# EAGLE board elm-post (EAGLE 4.16), part 1 of 2
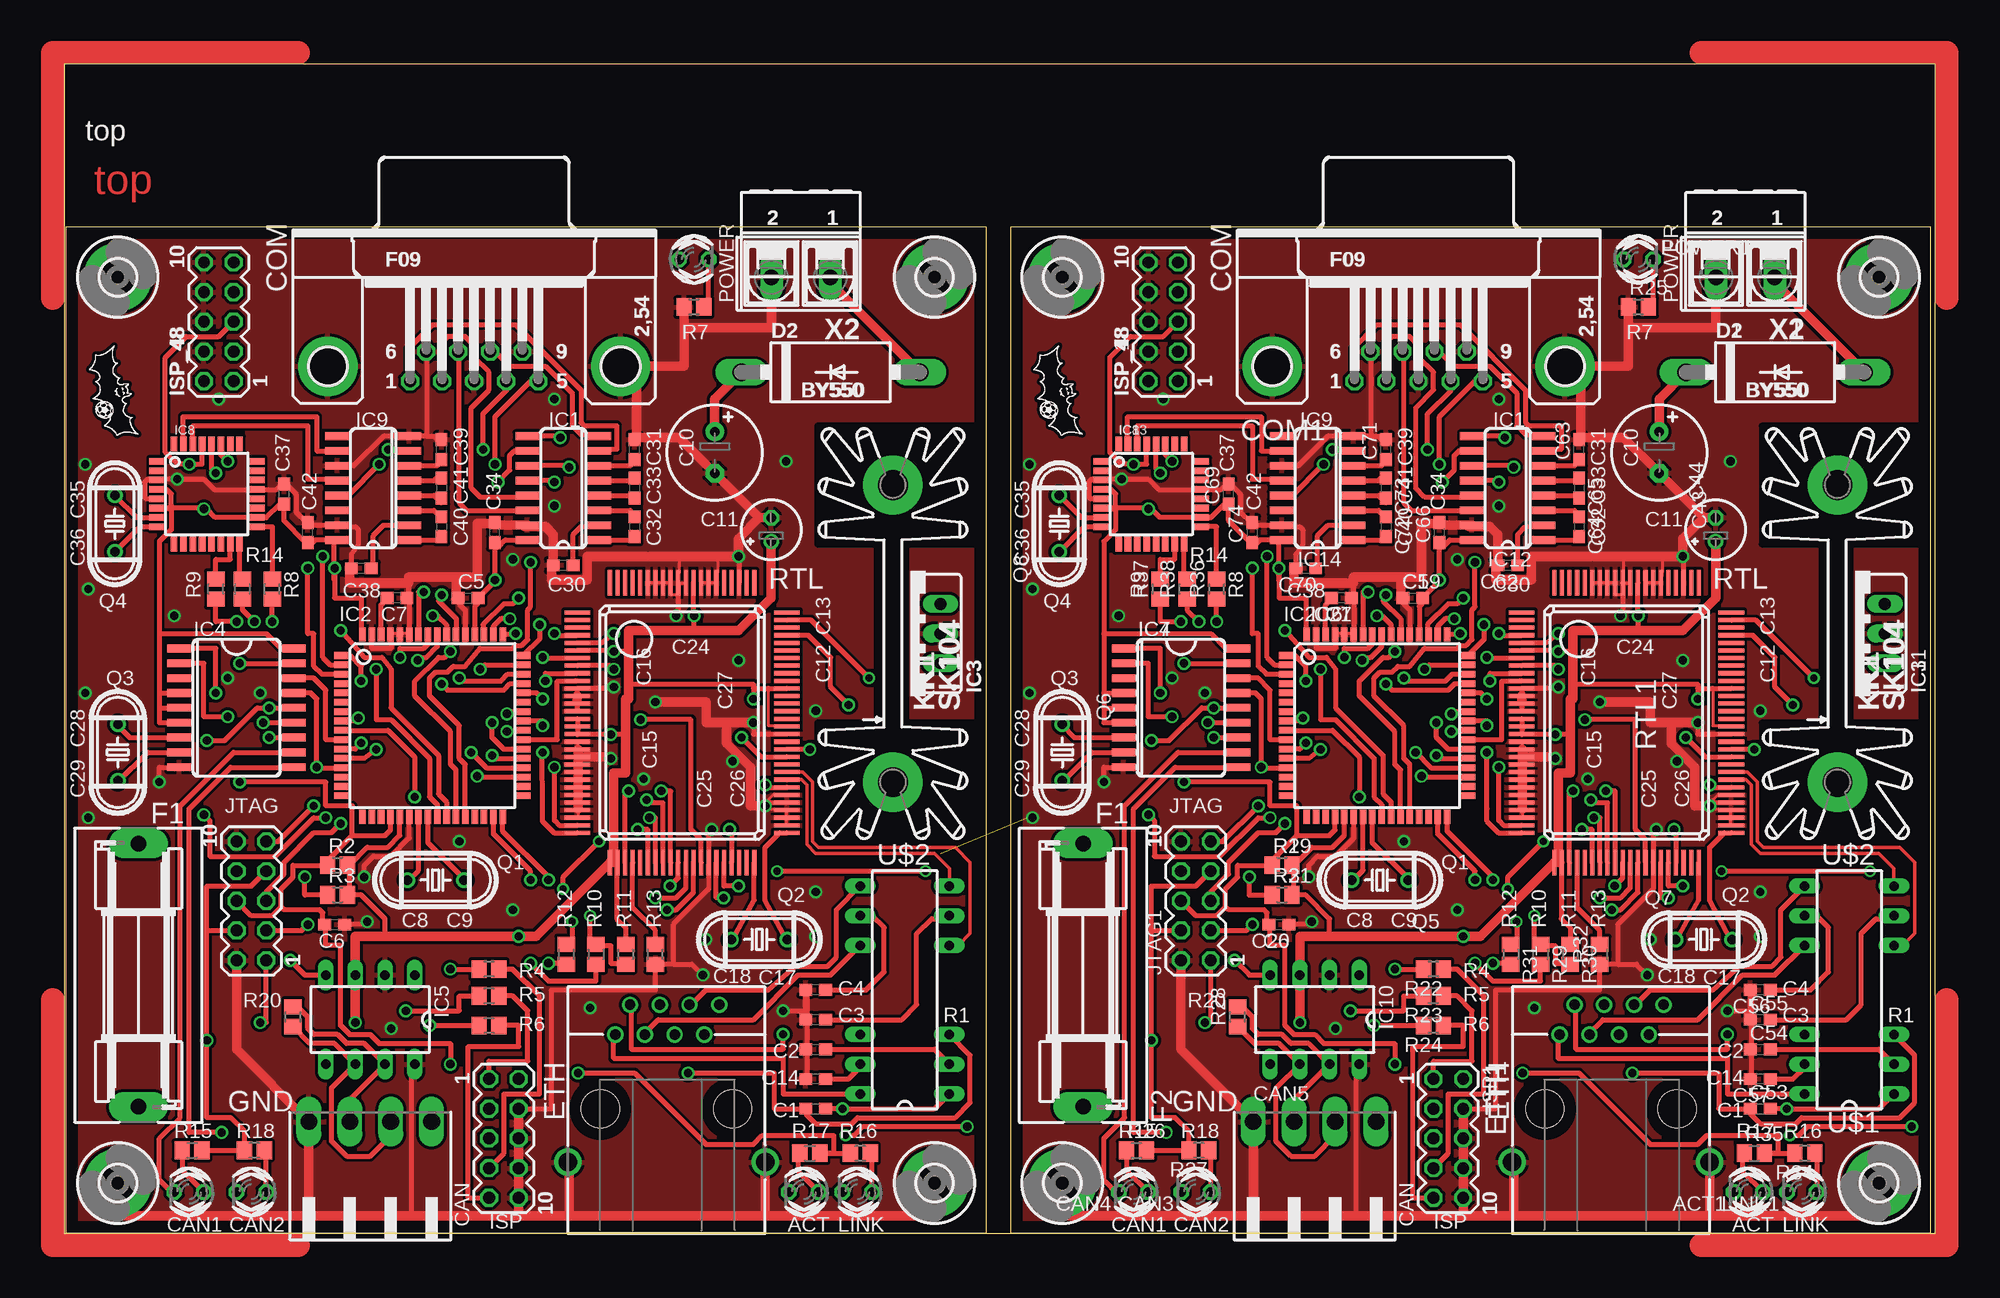
[diagram p0: board, top side]
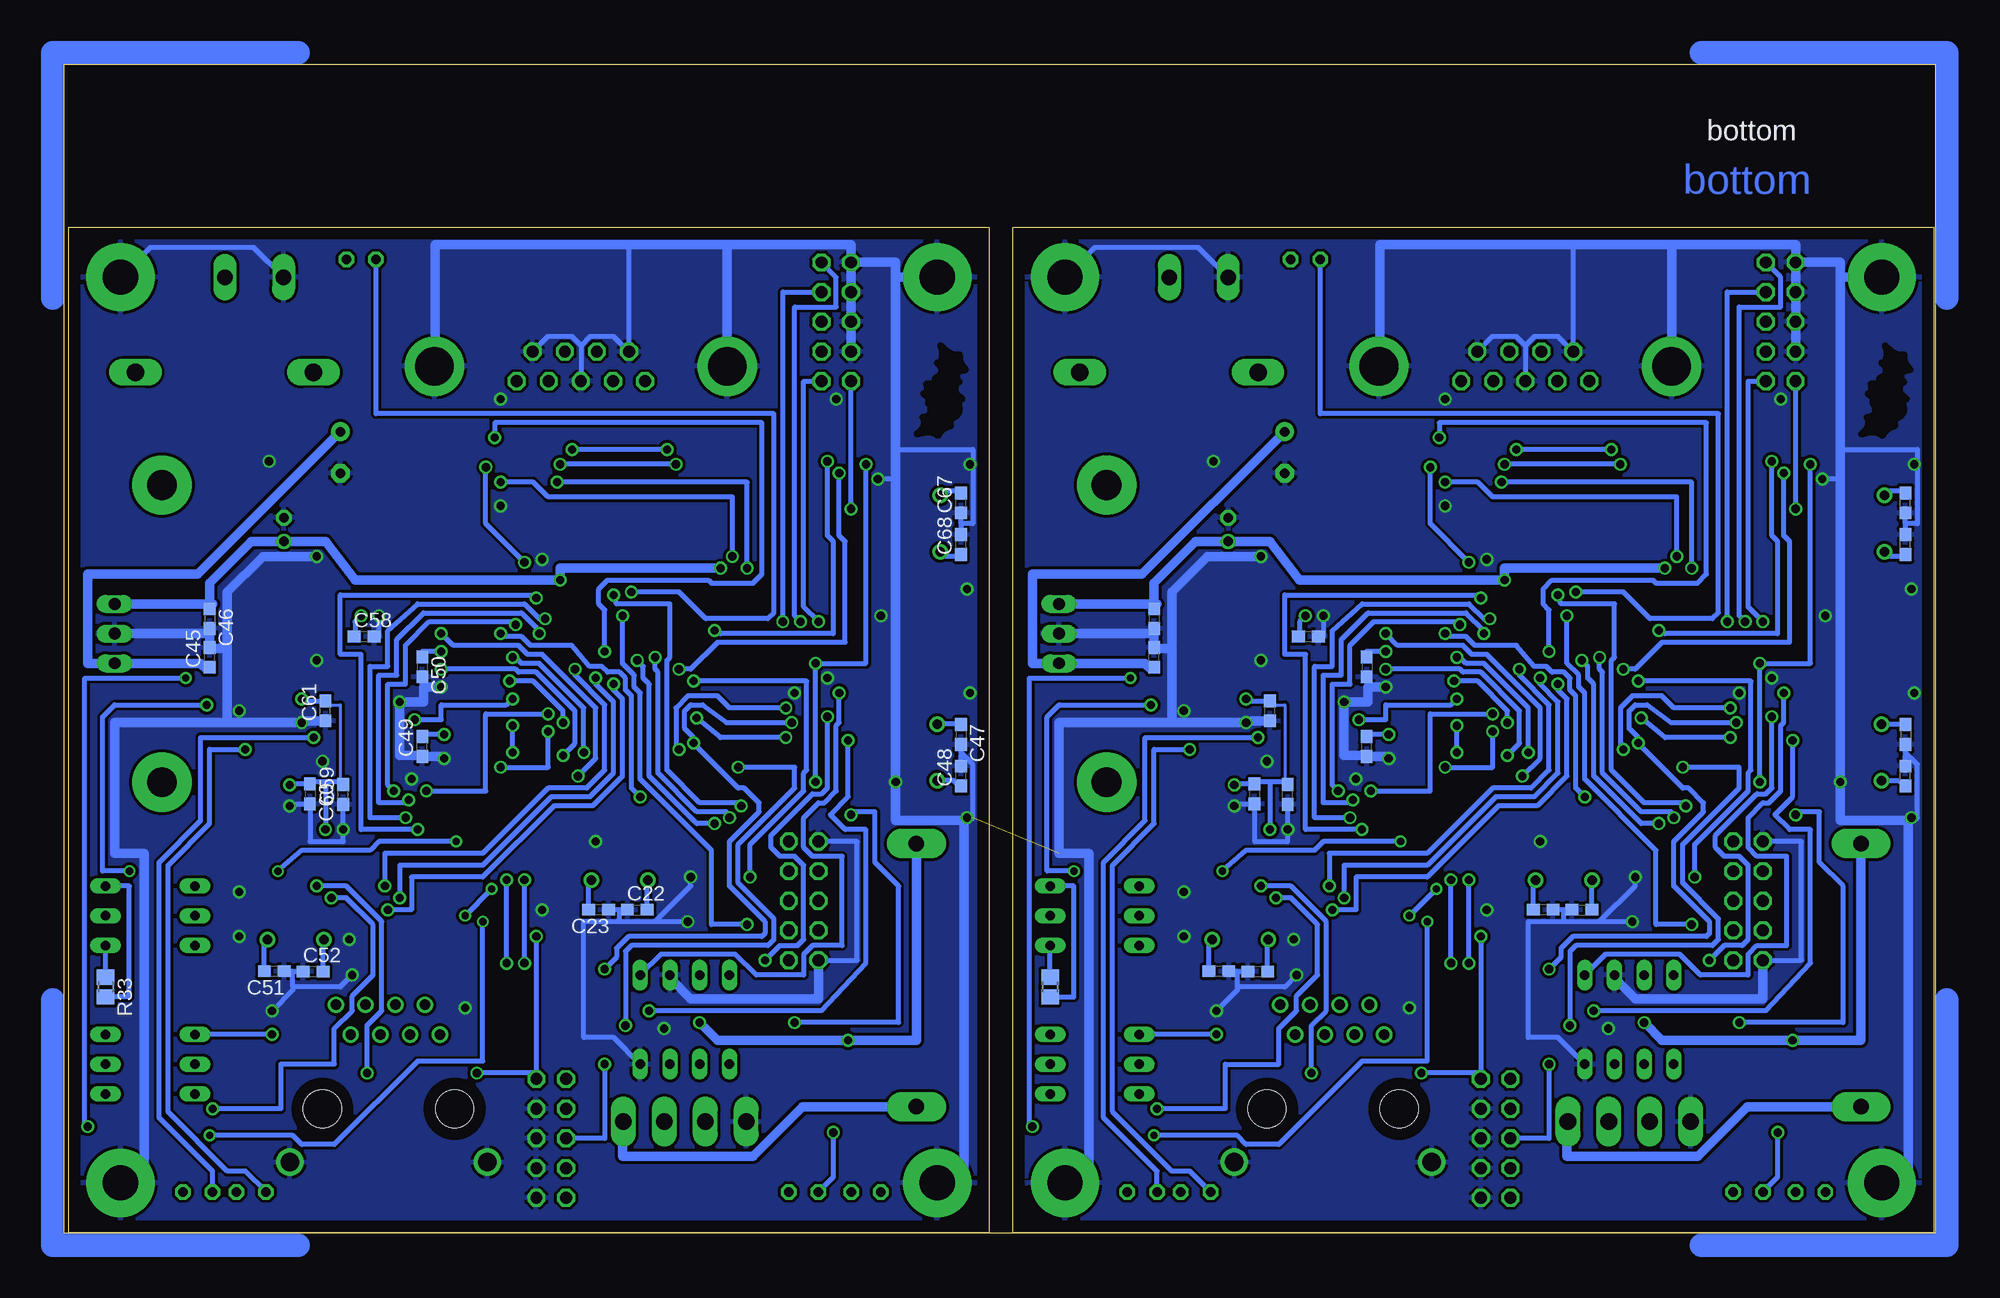
[diagram p1: board, bottom side, seen from below]

Size 160 x 100 mm. Coordinates in mm from the lower left corner, seen from the top.
Outline: 0.13,0.04 78.85,0.04 78.85,86.07 0.13,86.07 0.13,0.04
Outline: 0,0 160,0 160,100 0,100 0,0
Outline: 80.9,0.04 159.62,0.04 159.62,86.07 80.9,86.07 80.9,0.04
Copper layers (1*16): Top 0.035mm / dielectric 1.5mm / Bottom 0.035mm
Design rules "olimex_8mils": minimum track width 10mil, minimum drill 24mil, track to track 8mil, track to pad 8mil, pad to pad 8mil, via to via 8mil, smd to smd 8mil, copper to edge 40mil, drill to drill 10mil, minimum pad ring 10mil, minimum via ring 8mil, stop-mask expansion 0mil, vias tented up to drill 0mil, thermal gap 10mil
tRestrict: area 2.1,73.9 to 2.1,73.9; area 2.1,73.9 to 2.2,74; area 2.2,73.9 to 2.2,74; area 2.2,73.8 to 2.2,74; area 2.2,73.9 to 2.2,74; area 2.2,73.8 to 2.2,73.9; area 2.2,74 to 2.3,74.1; area 2.2,73.8 to 2.3,73.9; area 2.3,74 to 2.3,74.1; area 2.3,73.8 to 2.3,73.9; area 2.3,74 to 2.3,74.1; area 2.3,73.8 to 2.3,73.9; 1606 more areas
bRestrict: area 2.1,73.9 to 2.1,73.9; area 2.1,73.9 to 2.2,74; area 2.2,73.9 to 2.2,74; area 2.2,73.8 to 2.2,74; area 2.2,73.9 to 2.2,74; area 2.2,73.8 to 2.2,73.9; area 2.2,74 to 2.3,74.1; area 2.2,73.8 to 2.3,73.9; area 2.3,74 to 2.3,74.1; area 2.3,73.8 to 2.3,73.9; area 2.3,74 to 2.3,74.1; area 2.3,73.8 to 2.3,73.9; 1606 more areas

## Footprints (pad centres in the part's own frame; a part is rotated, then mirrored left to right if it is on the bottom)
LED3MM = drill 0.813 octagon: A -1.27,0; K 1.27,0
C0603 = smd 1.1 x 1: 1 -0.85,0; 2 0.85,0
E3,5-8 = drill 0.813 pad 1.6 round: + -1.778,0 | drill 0.813 pad 1.6 octagon: - 1.778,0
E2-5 = drill 0.813 pad 1.27 round: + -1.016,0 | drill 0.813 pad 1.27 octagon: - 1.016,0
90-4 = drill 1.422 long: 1 -5.25,5.25; 2 -1.75,5.25; 3 1.75,5.25; 4 5.25,5.25
F09HP = drill 1.016 octagon: 1 -5.486,-1.27; 2 -2.743,-1.27; 3 0,-1.27; 4 2.743,-1.27; 5 5.486,-1.27; 6 -4.115,1.27; 7 -1.372,1.27; 8 1.372,1.27; 9 4.115,1.27 | drill 3.302 pad 5.08 round: G1 -12.522,0; G2 12.522,0
DO27-15 = drill 1.499 long: A 7.62,0; C -7.62,0
557786-1 = drill 0.889 round: 1-1 -4.445,6.35; 1-2 -3.175,8.89; 1-3 -1.905,6.35; 1-4 -0.635,8.89; 1-5 0.635,6.35; 1-6 1.905,8.89; 1-7 3.175,6.35; 1-8 4.445,8.89 | drill 1.575 pad 2.184 round: G1 -8.509,-4.572; G2 8.382,-4.572 | hole 3.251: -5.715,0; 5.588,0
SH22,5A = drill 1.321 pad 2.54 long: 1 -11.252,0; 2 11.252,0
3,0-PAD = drill 3 pad 5.842 round: B3,0 0,0
SO16 = smd 0.66 x 2.032: 1 -4.445,-3.073; 2 -3.175,-3.073; 3 -1.905,-3.073; 4 -0.635,-3.073; 5 0.635,-3.073; 6 1.905,-3.073; 7 3.175,-3.073; 8 4.445,-3.073; 9 4.445,3.073; 10 3.175,3.073; 11 1.905,3.073; 12 0.635,3.073; 13 -0.635,3.073; 14 -1.905,3.073; 15 -3.175,3.073; 16 -4.445,3.073
TQFP64 = smd 1.194 x 0.559: 1 -7.8,6; 2 -7.8,5.2; 3 -7.8,4.4; 4 -7.8,3.6; 5 -7.8,2.8; 6 -7.8,2; 7 -7.8,1.2; 8 -7.8,0.4; 9 -7.8,-0.4; 10 -7.8,-1.2; 11 -7.8,-2; 12 -7.8,-2.8; 13 -7.8,-3.6; 14 -7.8,-4.4; 15 -7.8,-5.2; 16 -7.8,-6; 33 7.8,-6; 34 7.8,-5.2; 35 7.8,-4.4; 36 7.8,-3.6; 37 7.8,-2.8; 38 7.8,-2; 39 7.8,-1.2; 40 7.8,-0.4; 41 7.8,0.4; 42 7.8,1.2; 43 7.8,2; 44 7.8,2.8; 45 7.8,3.6; 46 7.8,4.4; 47 7.8,5.2; 48 7.8,6 | smd 0.559 x 1.194: 17 -6,-7.8; 18 -5.2,-7.8; 19 -4.4,-7.8; 20 -3.6,-7.8; 21 -2.8,-7.8; 22 -2,-7.8; 23 -1.2,-7.8; 24 -0.4,-7.8; 25 0.4,-7.8; 26 1.2,-7.8; 27 2,-7.8; 28 2.8,-7.8; 29 3.6,-7.8; 30 4.4,-7.8; 31 5.2,-7.8; 32 6,-7.8; 49 6,7.8; 50 5.2,7.8; 51 4.4,7.8; 52 3.6,7.8; 53 2.8,7.8; 54 2,7.8; 55 1.2,7.8; 56 0.4,7.8; 57 -0.4,7.8; 58 -1.2,7.8; 59 -2,7.8; 60 -2.8,7.8; 61 -3.6,7.8; 62 -4.4,7.8; 63 -5.2,7.8; 64 -6,7.8
78XXS = drill 1.016 long: GND 0,-2.54; IN -2.54,-2.54; OUT 2.54,-2.54
SO18L = smd 0.66 x 2.032: 1 -5.08,-4.902; 2 -3.81,-4.902; 3 -2.54,-4.902; 4 -1.27,-4.902; 5 0,-4.902; 6 1.27,-4.902; 7 2.54,-4.902; 8 3.81,-4.902; 9 5.08,-4.902; 10 5.08,4.902; 11 3.81,4.902; 12 2.54,4.902; 13 1.27,4.902; 14 0,4.902; 15 -1.27,4.902; 16 -2.54,4.902; 17 -3.81,4.902; 18 -5.08,4.902
DIL08 = drill 0.813 long: 1 -3.81,-3.81; 2 -1.27,-3.81; 3 1.27,-3.81; 4 3.81,-3.81; 5 3.81,3.81; 6 1.27,3.81; 7 -1.27,3.81; 8 -3.81,3.81
TQFP32-08 = smd 1.27 x 0.559: 1 -4.293,2.8; 2 -4.293,2; 3 -4.293,1.2; 4 -4.293,0.4; 5 -4.293,-0.4; 6 -4.293,-1.2; 7 -4.293,-2; 8 -4.293,-2.8; 17 4.293,-2.8; 18 4.293,-2; 19 4.293,-1.2; 20 4.293,-0.4; 21 4.293,0.4; 22 4.293,1.2; 23 4.293,2; 24 4.293,2.8 | smd 0.559 x 1.27: 9 -2.8,-4.293; 10 -2,-4.293; 11 -1.2,-4.293; 12 -0.4,-4.293; 13 0.4,-4.293; 14 1.2,-4.293; 15 2,-4.293; 16 2.8,-4.293; 25 2.8,4.293; 26 2,4.293; 27 1.2,4.293; 28 0.4,4.293; 29 -0.4,4.293; 30 -1.2,4.293; 31 -2,4.293; 32 -2.8,4.293
MA05-2 = drill 1.016 octagon: 1 -5.08,-1.27; 2 -5.08,1.27; 3 -2.54,-1.27; 4 -2.54,1.27; 5 0,-1.27; 6 0,1.27; 7 2.54,-1.27; 8 2.54,1.27; 9 5.08,-1.27; 10 5.08,1.27
SK104 = drill 2.54 pad 5.08 round: A2,5 -12.7,-0.762; B2,5 12.7,-0.762
HC49U-V = drill 0.813 round: 1 -2.413,0; 2 2.413,0
HC49/S = drill 0.813 round: 1 -2.413,0; 2 2.413,0
R0805 = smd 1.3 x 1.5: 1 -0.85,0; 2 0.85,0
RTL8019AS = smd 0.35 x 2.2: 1 -9.425,-8.965; 2 -8.775,-8.965; 3 -8.125,-8.965; 4 -7.475,-8.965; 5 -6.825,-8.965; 6 -6.175,-8.965; 7 -5.525,-8.965; 8 -4.875,-8.965; 9 -4.225,-8.965; 10 -3.575,-8.965; 11 -2.925,-8.965; 12 -2.275,-8.965; 13 -1.625,-8.965; 14 -0.975,-8.965; 15 -0.325,-8.965; 16 0.325,-8.965; 17 0.975,-8.965; 18 1.625,-8.965; 19 2.275,-8.965; 20 2.925,-8.965; 21 3.575,-8.965; 22 4.225,-8.965; 23 4.875,-8.965; 24 5.525,-8.965; 25 6.175,-8.965; 26 6.825,-8.965; 27 7.475,-8.965; 28 8.125,-8.965; 29 8.775,-8.965; 30 9.425,-8.965; 51 9.425,8.965; 52 8.775,8.965; 53 8.125,8.965; 54 7.475,8.965; 55 6.825,8.965; 56 6.175,8.965; 57 5.525,8.965; 58 4.875,8.965; 59 4.225,8.965; 60 3.575,8.965; 61 2.925,8.965; 62 2.275,8.965; 63 1.625,8.965; 64 0.975,8.965; 65 0.325,8.965; 66 -0.325,8.965; 67 -0.975,8.965; 68 -1.625,8.965; 69 -2.275,8.965; 70 -2.925,8.965; 71 -3.575,8.965; 72 -4.225,8.965; 73 -4.875,8.965; 74 -5.525,8.965; 75 -6.175,8.965; 76 -6.825,8.965; 77 -7.475,8.965; 78 -8.125,8.965; 79 -8.775,8.965; 80 -9.425,8.965 | smd 2.2 x 0.35: 31 11.965,-6.175; 32 11.965,-5.525; 33 11.965,-4.875; 34 11.965,-4.225; 35 11.965,-3.575; 36 11.965,-2.925; 37 11.965,-2.275; 38 11.965,-1.625; 39 11.965,-0.975; 40 11.965,-0.325; 41 11.965,0.325; 42 11.965,0.975; 43 11.965,1.625; 44 11.965,2.275; 45 11.965,2.925; 46 11.965,3.575; 47 11.965,4.225; 48 11.965,4.875; 49 11.965,5.525; 50 11.965,6.175; 81 -11.965,6.175; 82 -11.965,5.525; 83 -11.965,4.875; 84 -11.965,4.225; 85 -11.965,3.575; 86 -11.965,2.925; 87 -11.965,2.275; 88 -11.965,1.625; 89 -11.965,0.975; 90 -11.965,0.325; 91 -11.965,-0.325; 92 -11.965,-0.975; 93 -11.965,-1.625; 94 -11.965,-2.275; 95 -11.965,-2.925; 96 -11.965,-3.575; 97 -11.965,-4.225; 98 -11.965,-4.875; 99 -11.965,-5.525; 100 -11.965,-6.175
DIL16/12 = drill 0.813 long: 1 -8.89,-3.81; 2 -6.35,-3.81; 3 -3.81,-3.81; 4 3.81,-3.81; 5 6.35,-3.81; 6 8.89,-3.81; 7 8.89,3.81; 8 6.35,3.81; 9 3.81,3.81; 10 -3.81,3.81; 11 -6.35,3.81; 12 -8.89,3.81
AK500/2-H = drill 1.321 long: 1 -2.515,0; 2 2.515,0

## Placement (x,y rotation side)
ACT  red  [LED3MM]  63.25,3.56 180 top
ACT1  red  [LED3MM]  144.02,3.56 180 top
C1  66p  [C0603]  64.26,10.67 0 top
C2  10n  [C0603]  64.26,15.75 0 top
C3  10n  [C0603]  64.26,18.29 0 top
C4  10n  [C0603]  64.26,20.83 180 top
C5  100n  [C0603]  34.54,54.36 0 top
C6  100n  [C0603]  23.11,26.42 180 top
C7  100n  [C0603]  28.45,54.36 180 top
C8  22p  [C0603]  30.23,27.69 0 bottom
C9  22p  [C0603]  33.53,27.69 180 bottom
C10  220µF/25V  [E3,5-8]  55.63,66.8 270 top
C11  10µF/35V  [E2-5]  60.45,60.2 90 top
C12  100n  [C0603]  66.8,49.28 90 bottom
C13  100n  [C0603]  66.8,52.58 270 bottom
C14  10n  [C0603]  64.26,13.21 180 top
C15  100n  [C0603]  48.62,41.66 90 bottom
C16  100n  [C0603]  48.62,48.46 270 bottom
C17  27p  [C0603]  61.26,22.43 180 bottom
C18  27p  [C0603]  57.94,22.4 0 bottom
C19  100n  [C0603]  115.32,54.36 0 top
C20  100n  [C0603]  103.89,26.42 180 top
C21  100n  [C0603]  109.22,54.36 180 top
C22  22p  [C0603]  111,27.69 0 bottom
C23  22p  [C0603]  114.3,27.69 180 bottom
C24  100n  [C0603]  53.59,51.05 0 bottom
C25  100n  [C0603]  55.37,37.54 90 bottom
C26  100n  [C0603]  58.22,37.59 270 bottom
C27  100n  [C0603]  56.9,44.7 90 bottom
C28  22p  [C0603]  2.54,42.67 270 bottom
C29  22p  [C0603]  2.54,39.12 90 bottom
C30  100n  [C0603]  42.67,57.15 180 top
C31  100n  [C0603]  48.77,67.06 90 top
C32  100n  [C0603]  48.77,60.45 270 top
C33  100n  [C0603]  48.77,63.75 270 top
C34  100n  [C0603]  36.83,59.94 90 top
C35  22p  [C0603]  2.54,62.48 90 bottom
C36  22p  [C0603]  2.54,58.93 90 bottom
C37  100n  [C0603]  18.8,63.25 90 top
C38  100n  [C0603]  25.4,56.9 180 top
C39  100n  [C0603]  32.26,67.06 90 top
C40  100n  [C0603]  32.26,60.45 270 top
C41  100n  [C0603]  32.26,63.75 270 top
C42  100n  [C0603]  20.83,59.94 90 top
C43  220µF/25V  [E3,5-8]  136.4,66.8 270 top
C44  10µF/35V  [E2-5]  141.22,60.2 90 top
C45  100n  [C0603]  147.57,49.28 90 bottom
C46  100n  [C0603]  147.57,52.58 270 bottom
C47  22p  [C0603]  83.31,42.67 270 bottom
C48  22p  [C0603]  83.31,39.12 90 bottom
C49  100n  [C0603]  129.39,41.66 90 bottom
C50  100n  [C0603]  129.39,48.46 270 bottom
C51  27p  [C0603]  142.04,22.43 180 bottom
C52  27p  [C0603]  138.71,22.4 0 bottom
C53  66p  [C0603]  145.03,10.67 0 top
C54  10n  [C0603]  145.03,15.75 0 top
C55  10n  [C0603]  145.03,18.29 0 top
C56  10n  [C0603]  145.03,20.83 180 top
C57  10n  [C0603]  145.03,13.21 180 top
C58  100n  [C0603]  134.37,51.05 0 bottom
C59  100n  [C0603]  136.14,37.54 90 bottom
C60  100n  [C0603]  138.99,37.59 270 bottom
C61  100n  [C0603]  137.67,44.7 90 bottom
C62  100n  [C0603]  123.44,57.15 180 top
C63  100n  [C0603]  129.54,67.06 90 top
C64  100n  [C0603]  129.54,60.45 270 top
C65  100n  [C0603]  129.54,63.75 270 top
C66  100n  [C0603]  117.6,59.94 90 top
C67  22p  [C0603]  83.31,62.48 90 bottom
C68  22p  [C0603]  83.31,58.93 90 bottom
C69  100n  [C0603]  99.57,63.25 90 top
C70  100n  [C0603]  106.17,56.9 180 top
C71  100n  [C0603]  113.03,67.06 90 top
C72  100n  [C0603]  113.03,60.45 270 top
C73  100n  [C0603]  113.03,63.75 270 top
C74  100n  [C0603]  101.6,59.94 90 top
CAN  [90-4]  26.16,4.32 0 top
CAN1  yellow  [LED3MM]  10.67,3.56 180 top
CAN2  red  [LED3MM]  16,3.56 180 top
CAN3  red  [LED3MM]  96.77,3.56 180 top
CAN4  yellow  [LED3MM]  91.44,3.56 180 top
CAN5  [90-4]  106.93,4.32 0 top
COM  [F09HP]  35.05,74.17 0 top
COM1  [F09HP]  115.82,74.17 0 top
D1  BY550  [DO27-15]  146.3,73.66 0 top
D2  BY550  [DO27-15]  65.53,73.66 0 top
ETH  [557786-1]  51.56,10.67 0 top
ETH1  [557786-1]  132.33,10.67 0 top
F1  FUSESH22,5A  [SH22,5A]  6.35,22.1 90 top
F2  FUSESH22,5A  [SH22,5A]  87.12,22.1 90 top
H1  MOUNT-PAD-ROUND3.0  [3,0-PAD]  74.42,4.32 0 top
H2  MOUNT-PAD-ROUND3.0  [3,0-PAD]  4.57,81.79 0 top
H3  MOUNT-PAD-ROUND3.0  [3,0-PAD]  4.57,4.32 0 top
H4  MOUNT-PAD-ROUND3.0  [3,0-PAD]  74.42,81.79 0 top
H5  MOUNT-PAD-ROUND3.0  [3,0-PAD]  155.19,4.32 0 top
H6  MOUNT-PAD-ROUND3.0  [3,0-PAD]  85.34,81.79 0 top
H7  MOUNT-PAD-ROUND3.0  [3,0-PAD]  85.34,4.32 0 top
H8  MOUNT-PAD-ROUND3.0  [3,0-PAD]  155.19,81.79 0 top
IC1  MAX3232CSE  [SO16]  42.67,63.75 90 top
IC2  MEGA128-A  [TQFP64]  31.5,43.43 0 top
IC3  [78XXS]  72.39,51.31 90 top
IC4  MCP2515-E/SO  [SO18L]  14.73,44.96 270 top
IC5  PCA82C250  [DIL08]  26.16,18.29 180 top
IC6  MEGA128-A  [TQFP64]  112.27,43.43 0 top
IC7  MCP2515-E/SO  [SO18L]  95.5,44.96 270 top
IC8  ATMega48  [TQFP32-08]  12.19,63.25 0 top
IC9  MAX3232CSE  [SO16]  26.42,63.75 90 top
IC10  PCA82C250  [DIL08]  106.93,18.29 180 top
IC11  [78XXS]  153.16,51.31 90 top
IC12  MAX3232CSE  [SO16]  123.44,63.75 90 top
IC13  ATMega48  [TQFP32-08]  92.96,63.25 0 top
IC14  MAX3232CSE  [SO16]  107.19,63.75 90 top
ISP  [MA05-2]  37.59,8.13 270 top
ISP1  [MA05-2]  118.36,8.13 270 top
ISP_1  [MA05-2]  93.98,77.98 90 top
ISP_48  [MA05-2]  13.21,77.98 90 top
JTAG  [MA05-2]  16,28.45 90 top
JTAG1  [MA05-2]  96.77,28.45 90 top
KK1  SK104  [SK104]  70.1,51.31 90 top
KK2  SK104  [SK104]  150.88,51.31 90 top
LINK  yellow  [LED3MM]  67.82,3.56 180 top
LINK1  yellow  [LED3MM]  148.59,3.56 180 top
POWER  green  [LED3MM]  53.85,83.31 0 top
POWER1  green  [LED3MM]  134.62,83.31 0 top
Q1  16MHz  [HC49U-V]  31.75,30.23 180 top
Q2  20MHz  [HC49U-V]  59.44,25.15 0 top
Q3  16MHz  [HC49U-V]  4.57,41.15 270 top
Q4  12MHz  [HC49/S]  4.32,60.71 90 top
Q5  16MHz  [HC49U-V]  112.52,30.23 180 top
Q6  16MHz  [HC49U-V]  85.34,41.15 270 top
Q7  20MHz  [HC49U-V]  140.21,25.15 0 top
Q8  12MHz  [HC49/S]  85.09,60.71 90 top
R1  200  [R0805]  75.69,21.08 270 bottom
R2  10k  [R0805]  23.37,31.5 0 top
R3  1k  [R0805]  23.37,28.96 0 top
R4  4k7  [R0805]  36.32,22.61 180 top
R5  4k7  [R0805]  36.32,20.32 180 top
R6  4k7  [R0805]  36.32,17.78 180 top
R7  2k7  [R0805]  53.85,79.25 0 top
R8  4k7  [R0805]  17.78,55.12 90 top
R9  4k7  [R0805]  12.95,55.12 90 top
R10  0  [R0805]  45.47,23.88 270 top
R11  10k  [R0805]  48.01,23.88 270 top
R12  4k7  [R0805]  42.93,23.88 270 top
R13  27k  [R0805]  50.55,23.88 90 top
R14  4k7  [R0805]  15.24,55.12 90 top
R15  2k7  [R0805]  10.92,7.11 0 top
R16  2k7  [R0805]  68.07,6.86 180 top
R17  2k7  [R0805]  63.75,6.86 0 top
R18  2k7  [R0805]  16.26,7.11 180 top
R19  10k  [R0805]  104.14,31.5 0 top
R20  4k7  [R0805]  19.56,18.54 90 top
R21  1k  [R0805]  104.14,28.96 0 top
R22  4k7  [R0805]  117.09,22.61 180 top
R23  4k7  [R0805]  117.09,20.32 180 top
R24  4k7  [R0805]  117.09,17.78 180 top
R25  2k7  [R0805]  134.62,79.25 0 top
R26  2k7  [R0805]  91.69,7.11 0 top
R27  2k7  [R0805]  97.03,7.11 180 top
R28  4k7  [R0805]  100.33,18.54 90 top
R29  0  [R0805]  126.24,23.88 270 top
R30  10k  [R0805]  128.78,23.88 270 top
R31  4k7  [R0805]  123.7,23.88 270 top
R32  27k  [R0805]  131.32,23.88 90 top
R33  200  [R0805]  156.46,21.08 270 bottom
R34  2k7  [R0805]  148.84,6.86 180 top
R35  2k7  [R0805]  144.53,6.86 0 top
R36  4k7  [R0805]  98.55,55.12 90 top
R37  4k7  [R0805]  93.73,55.12 90 top
R38  4k7  [R0805]  96.01,55.12 90 top
RTL  RTL8019AS  [RTL8019AS]  52.83,43.69 270 top
RTL1  RTL8019AS  [RTL8019AS]  133.6,43.69 270 top
U$1  [DIL16/12]  152.65,20.83 90 top
U$2  [DIL16/12]  71.88,20.83 90 top
X1  [AK500/2-H]  143.76,81.79 180 top
X2  [AK500/2-H]  62.99,81.79 180 top

## Library data of the parts
ACT ACT1 CAN1-CAN4 LINK LINK1 POWER POWER1 = led
C1-C74 R1-R38 = rcl
CAN CAN5 = con-weidmueller-sl35
COM COM1 = con-subd
D1 D2 = diode
ETH ETH1 = con-amp
F1 F2 = fuse
H1-H8 = holes
IC1 IC9 IC12 IC14 = maxim
IC2 IC6 IC8 IC13 = atmel
IC3 IC11 = v-reg
IC4 IC7 = mcp2515
IC5 IC10 = micro-philips
ISP ISP1 ISP_1 ISP_48 JTAG JTAG1 = con-lstb
KK1 KK2 = heatsink
Q1-Q8 = crystal
RTL RTL1 = rtl8019as
U$1 U$2 = Realtek
X1 X2 = con-ptr500

## Nets
A0: IC2.35 RTL.5
A1: IC2.36 RTL.7
A2: IC2.37 RTL.8
A3: IC2.38 RTL.9
A4: IC2.39 RTL.10
A5: IC2.40 RTL.29
A6: IC2.41 RTL.30
A7: IC2.42 RTL.33
A8: IC2.32 R12.2
A9: IC2.31 R10.2
A10: IC2.9 RTL.4
A11: IC6.42 RTL1.33
A12: IC6.41 RTL1.30
A13: IC6.40 RTL1.29
A14: IC6.39 RTL1.10
A15: IC6.38 RTL1.9
A16: IC6.37 RTL1.8
A17: IC6.36 RTL1.7
A18: IC6.35 RTL1.5
A19: IC6.32 R31.2
A20: IC6.31 R29.2
A21: IC6.9 RTL1.4
CAN_INT: IC2.8 IC4.12
CAN_INT1: IC6.8 IC7.12
CS: IC2.10 IC4.16
CS1: IC6.10 IC7.16
D0: IC2.51 RTL.36
D1: IC2.50 RTL.37
D2: IC2.49 RTL.38
D3: IC2.48 RTL.39
D4: IC2.47 RTL.40
D5: IC2.46 RTL.41
D6: IC2.45 RTL.42
D7: IC2.44 RTL.43
D8: IC6.51 RTL1.36
D9: IC6.50 RTL1.37
D10: IC6.49 RTL1.38
D11: IC6.48 RTL1.39
D12: IC6.47 RTL1.40
D13: IC6.46 RTL1.41
D14: IC6.45 RTL1.42
D15: IC6.44 RTL1.43
GND1: C2.1 C3.1 C4.2 C5.1 C6.1 C7.1 C8.1 C9.1 C10.- C11.- C12.2 C13.2 C14.2 C15.1 C16.2 C17.1 C18.1 C19.1 C20.1 C21.1 C22.1 C23.1 C24.2 C25.1 C26.2 C27.1 C28.2 C29.2 C30.2 C31.2 C34.2 C35.1 C36.2 C37.2 C38.2 C39.2 C42.2 C43.- C44.- C45.2 C46.2 C47.2 C48.2 C49.1 C50.2 C51.1 C52.1 C54.1 C55.1 C56.2 C57.2 C58.2 C59.1 C60.2 C61.1 C62.2 C63.2 C66.2 C67.1 C68.2 C69.2 C70.2 C71.2 C74.2 CAN5.1 CAN.1 COM1.3 COM1.6 COM1.9 COM1.G1 COM1.G2 COM.3 COM.6 COM.9 COM.G1 COM.G2 ETH1.G1 ETH1.G2 ETH.G1 ETH.G2 H1.B3,0 H2.B3,0 H3.B3,0 H4.B3,0 H5.B3,0 H6.B3,0 H7.B3,0 H8.B3,0 IC1.15 IC2.22 IC2.53 IC2.59 IC2.60 IC2.61 IC2.63 IC3.GND IC4.9 IC5.2 IC5.8 IC6.22 IC6.53 IC6.59 IC6.60 IC6.61 IC6.63 IC7.9 IC8.3 IC8.5 IC8.21 IC9.8 IC9.11 IC9.15 IC10.2 IC10.8 IC11.GND IC12.15 IC13.3 IC13.5 IC13.21 IC14.8 IC14.11 IC14.15 ISP1.4 ISP1.6 ISP1.8 ISP1.10 ISP.4 ISP.6 ISP.8 ISP.10 ISP_1.4 ISP_1.6 ISP_1.8 ISP_1.10 ISP_48.4 ISP_48.6 ISP_48.8 ISP_48.10 JTAG1.2 JTAG1.10 JTAG.2 JTAG.10 R7.1 R13.1 R25.1 R32.1 RTL1.11 RTL1.12 RTL1.13 RTL1.14 RTL1.18 RTL1.19 RTL1.20 RTL1.21 RTL1.22 RTL1.23 RTL1.24 RTL1.25 RTL1.26 RTL1.27 RTL1.28 RTL1.44 RTL1.52 RTL1.53 RTL1.54 RTL1.55 RTL1.56 RTL1.64 RTL1.83 RTL1.86 RTL1.87 RTL1.88 RTL1.90 RTL1.91 RTL1.92 RTL1.93 RTL1.94 RTL1.95 RTL.11 RTL.12 RTL.13 RTL.14 RTL.18 RTL.19 RTL.20 RTL.21 RTL.22 RTL.23 RTL.24 RTL.25 RTL.26 RTL.27 RTL.28 RTL.44 RTL.52 RTL.53 RTL.54 RTL.55 RTL.56 RTL.64 RTL.83 RTL.86 RTL.87 RTL.88 RTL.90 RTL.91 RTL.92 RTL.93 RTL.94 RTL.95 X1.2 X2.2
MISO: IC2.13 IC4.15 R6.2
MISO1: IC6.13 IC7.15 R24.2
MISO_1: IC13.16 R38.2
MISO_48: IC8.16 R14.2
MOSI: IC2.12 IC4.14 R5.2
MOSI1: IC6.12 IC7.14 R23.2
MOSI_1: IC13.15 R37.2
MOSI_48: IC8.15 R9.2
N$1: R1.2 RTL.58 U$2.6
N$2: IC4.1 IC5.1
N$3: R1.1 RTL.59 U$2.4
N$4: C1.1 RTL.46 U$2.3
N$5: C7.2 IC2.62
N$6: C9.2 IC2.24 Q1.1
N$7: C8.2 IC2.23 Q1.2
N$8: C10.+ C12.1 D2.C IC3.IN
N$9: COM.1 IC1.7
N$10: D2.A X2.1
N$11: C1.2 RTL.45 U$2.1
N$12: C3.2 U$2.5
N$13: C2.2 U$2.2
N$14: C14.1 U$2.11
N$15: C4.1 U$2.8
N$16: CAN.4 F1.1
N$17: ISP_48.9 R14.1
N$18: ETH.1-1 U$2.12
N$19: ETH.1-2 U$2.10
N$20: ETH.1-3 U$2.9
N$21: IC4.2 IC5.4
N$22: ISP.9 R6.1
N$23: CAN.3 IC5.6 R20.1
N$24: ETH.1-6 U$2.7
N$25: ISP.1 R5.1
N$26: IC2.1 R3.1
N$27: CAN1.K IC4.11
N$28: LINK.A R16.1
N$29: ISP.7 R4.1
N$30: ISP_48.1 R9.1
N$31: POWER.K R7.2
N$32: IC2.58 POWER.A
N$33: COM.2 IC1.13
N$34: C17.2 Q2.2 RTL.51
N$35: C18.2 Q2.1 RTL.50
N$36: R10.1 R11.2 RTL.77
N$37: R12.1 RTL.79
N$38: CAN2.K IC4.10
N$39: R13.2 RTL.34
N$40: ISP_48.7 R8.1
N$44: ACT.A R17.1
N$45: LINK.K RTL.61
N$47: ACT.K RTL.62
N$48: CAN1.A R15.1
N$52: CAN2.A R18.1
N$53: C28.1 IC4.7 Q3.1
N$54: C29.1 IC4.8 Q3.2
N$57: C21.2 IC6.62
N$58: C23.2 IC6.24 Q5.1
N$59: CAN.2 IC5.7 R20.2
N$60: C32.2 IC1.1
N$61: C33.2 IC1.4
N$62: C22.2 IC6.23 Q5.2
N$63: IC6.1 R21.1
N$64: ISP1.9 R24.1
N$65: ISP1.1 R23.1
N$66: ISP1.7 R22.1
N$67: IC6.54 JTAG1.9
N$68: IC2.54 JTAG.9
N$69: IC2.55 JTAG.3
N$70: IC2.56 JTAG.5
N$71: IC2.57 JTAG.1
N$72: C33.1 IC1.5
N$73: C32.1 IC1.3
N$74: COM.7 IC1.14
N$75: COM.8 IC1.8
N$76: C30.1 IC1.2
N$77: C31.1 IC1.6
N$78: COM.4 IC9.7
N$79: C35.2 IC8.7 Q4.2
N$80: C36.1 IC8.8 Q4.1
N$81: IC6.55 JTAG1.3
N$82: COM.5 IC9.13
N$83: C40.2 IC9.1
N$84: C41.2 IC9.4
N$85: C41.1 IC9.5
N$86: C40.1 IC9.3
N$87: IC8.30 IC9.12
N$88: IC8.31 IC9.10
N$89: C38.1 IC9.2
N$90: C39.1 IC9.6
N$91: IC6.56 JTAG1.5
N$92: IC6.57 JTAG1.1
N$93: POWER1.K R25.2
N$94: IC6.58 POWER1.A
N$95: IC7.1 IC10.1
N$96: IC7.2 IC10.4
N$97: C43.+ C45.1 D1.C IC11.IN
N$98: D1.A X1.1
N$99: CAN4.K IC7.11
N$100: CAN3.K IC7.10
N$101: CAN4.A R26.1
N$102: CAN3.A R27.1
N$103: C47.1 IC7.7 Q6.1
N$104: C48.1 IC7.8 Q6.2
N$105: CAN5.3 IC10.6 R28.1
N$106: CAN5.2 IC10.7 R28.2
N$107: C51.2 Q7.2 RTL1.51
N$108: C52.2 Q7.1 RTL1.50
N$109: R29.1 R30.2 RTL1.77
N$110: R31.1 RTL1.79
N$111: R32.2 RTL1.34
N$112: R33.2 RTL1.58 U$1.6
N$113: R33.1 RTL1.59 U$1.4
N$114: C53.1 RTL1.46 U$1.3
N$115: C53.2 RTL1.45 U$1.1
N$116: C55.2 U$1.5
N$117: C54.2 U$1.2
N$118: C57.1 U$1.11
N$119: C56.1 U$1.8
N$120: ETH1.1-1 U$1.12
N$121: ETH1.1-2 U$1.10
N$122: ETH1.1-3 U$1.9
N$123: ETH1.1-6 U$1.7
N$124: LINK1.A R34.1
N$125: ACT1.A R35.1
N$126: LINK1.K RTL1.61
N$127: ACT1.K RTL1.62
N$128: C64.2 IC12.1
N$129: C65.2 IC12.4
N$130: C65.1 IC12.5
N$131: C64.1 IC12.3
N$132: COM1.7 IC12.14
N$133: COM1.8 IC12.8
N$134: C62.1 IC12.2
N$135: C63.1 IC12.6
N$136: C67.2 IC13.7 Q8.2
N$137: C68.1 IC13.8 Q8.1
N$138: COM1.4 IC14.7
N$139: COM1.5 IC14.13
N$140: C72.2 IC14.1
N$141: C73.2 IC14.4
N$142: C73.1 IC14.5
N$143: C72.1 IC14.3
N$144: C70.1 IC14.2
N$145: C71.1 IC14.6
N$146: IC13.30 IC14.12
N$147: IC13.31 IC14.10
N$148: COM1.1 IC12.7
N$149: COM1.2 IC12.13
N$150: CAN5.4 F2.1
N$151: ISP_1.9 R38.1
N$152: ISP_1.1 R37.1
N$153: ISP_1.7 R36.1
RST: C6.2 IC2.20 IC4.17 IC8.29 ISP.5 ISP_48.5 JTAG.6 R2.1
RST1: C20.2 IC6.20 IC7.17 IC13.29 ISP1.5 ISP_1.5 JTAG1.6 R19.1
RXD: IC1.12 IC2.2
RXD1: IC1.9 IC2.27
RXD2: IC6.27 IC12.9
RXD3: IC6.2 IC12.12
SCK: IC2.11 IC4.13 R4.2
SCK1: IC6.11 IC7.13 R22.2
SCK_1: IC13.17 R36.2
SCK_48: IC8.17 R8.2
SCL: IC2.25 IC8.28
SCL1: IC6.25 IC13.28
SDA: IC2.26 IC8.27
SDA1: IC6.26 IC13.27
TXD: IC1.10 IC2.3
TXD1: IC1.11 IC2.28
TXD2: IC6.28 IC12.11
TXD3: IC6.3 IC12.10
VCC: C5.2 C11.+ C13.1 C15.2 C16.1 C24.1 C25.2 C26.1 C27.2 C34.1 C37.1 C42.1 F1.2 IC1.16 IC2.21 IC2.52 IC2.64 IC3.OUT IC4.4 IC4.5 IC4.6 IC4.18 IC5.3 IC8.4 IC8.6 IC8.18 IC9.16 ISP.2 ISP_48.2 JTAG.4 JTAG.7 R2.2 R3.2 R11.1 R15.2 R16.2 R17.2 R18.2 RTL.6 RTL.15 RTL.16 RTL.17 RTL.31 RTL.32 RTL.47 RTL.57 RTL.65 RTL.70 RTL.89
VCC1: C19.2 C44.+ C46.1 C49.2 C50.1 C58.1 C59.2 C60.1 C61.2 C66.1 C69.1 C74.1 F2.2 IC6.21 IC6.52 IC6.64 IC7.4 IC7.5 IC7.6 IC7.18 IC10.3 IC11.OUT IC12.16 IC13.4 IC13.6 IC13.18 IC14.16 ISP1.2 ISP_1.2 JTAG1.4 JTAG1.7 R19.2 R21.2 R26.2 R27.2 R30.1 R34.2 R35.2 RTL1.6 RTL1.15 RTL1.16 RTL1.17 RTL1.31 RTL1.32 RTL1.47 RTL1.57 RTL1.65 RTL1.70 RTL1.89

## Tracks (layer width: path | path; a pad name or v marks a point on that pad's centre or on a via)
A0  (via drill 0.7)
  Top 0.406: RTL.5 45.97,50.51 v46.99,51.31 | IC2.35 35.31,39.03 v35.31,39.12
  Bottom 0.406: v35.31,39.12 33.78,40.64 33.78,44.96 38.35,49.53 39.62,49.53 40.39,50.29 45.97,50.29 v46.99,51.31
A1  (via drill 0.7)
  Top 0.406: RTL.7 41.15,49.21 v40.89,49.28 | IC2.36 36.11,39.83 v34.8,41.15
  Bottom 0.406: v34.8,41.15 34.8,44.96 38.61,48.77 40.13,48.77 40.64,49.28 v40.89,49.28
A2  (via drill 0.7)
  Top 0.406: RTL.8 46.69,48.56 v46.99,48.26 | IC2.37 36.84,40.63 v36.58,40.89
  Bottom 0.406: v36.58,40.89 35.56,41.91 35.56,44.7 38.86,48.01 40.39,48.01 40.64,48.26 v46.99,48.26
A3  (via drill 0.7)
  Top 0.406: 37.56,41.43 IC2.38 | v36.58,43.69 36.58,42.42 37.56,41.43 | 37.59,41.4 37.56,41.43 | RTL.9 41.15,47.91 v41.15,47.24
  Bottom 0.406: v36.58,43.69 36.58,44.7 39.12,47.24 v41.15,47.24
A4
  Top 0.406: IC2.39 42.16,42.23 42.16,47.24 43.69,47.24 43.69,47.26 RTL.10
A5  (via drill 0.7)
  Top 0.406: IC2.40 37.85,43.03 v37.85,42.93 | RTL.29 42.3,34.91 41.91,35.31 v41.91,39.88
  Bottom 0.406: v37.85,42.93 37.85,39.88 v41.91,39.88
A6  (via drill 0.7)
  Top 0.406: IC2.41 40.89,43.83 v40.89,43.43 | RTL.30 41.88,34.26 40.89,35.25 40.89,36.32 40.87,41.12 v40.89,41.15
  Bottom 0.406: v40.89,41.15 v40.89,43.43
A7  (via drill 0.7)
  Top 0.406: IC2.42 37.85,44.63 v37.85,44.45 | RTL.33 47.96,37.8 v48.26,37.85
  Bottom 0.406: v48.26,37.85 43.18,37.85 43.18,44.45 v37.85,44.45
A8  (via drill 0.7)
  Top 0.406: IC2.32 37.5,34.39 41.4,30.48 v41.4,30.23 | R12.2 42.93,23.11 v41.4,23.11
  Bottom 0.406: v41.4,23.11 v41.4,30.23
A9  (via drill 0.7)
  Top 0.406: IC2.31 36.7,34.17 39.88,30.99 v39.88,30.23 | R10.2 45.47,21.59 41.4,21.59 v39.88,23.11
  Bottom 0.406: v39.88,23.11 v39.88,30.23
A10  (via drill 0.7)
  Top 0.406: IC2.9 27.69,43.03 29.97,40.75 v29.97,37.34 | RTL.4 42.05,51.16 v41.91,51.31
  Bottom 0.406: v41.91,51.31 41.91,51.05 40.13,51.05 39.37,50.29 35.81,50.29 34.29,48.51 33.27,48.51 32.77,48.01 31.75,48.01 31.24,47.5 31.24,46.48 30.73,45.97 30.73,38.1 v29.97,37.34
A11  (via drill 0.7)
  Top 0.406: IC6.42 118.62,44.63 v118.62,44.45 | RTL1.33 128.73,37.8 v129.03,37.85
  Bottom 0.406: v129.03,37.85 123.95,37.85 123.95,44.45 v118.62,44.45
A12  (via drill 0.7)
  Top 0.406: IC6.41 121.67,43.83 v121.67,43.43 | RTL1.30 122.66,34.26 121.67,35.25 121.67,36.32 121.64,41.12 v121.67,41.15
  Bottom 0.406: v121.67,41.15 v121.67,43.43
A13  (via drill 0.7)
  Top 0.406: IC6.40 118.62,43.03 v118.62,42.93 | RTL1.29 123.08,34.91 122.68,35.31 v122.68,39.88
  Bottom 0.406: v118.62,42.93 118.62,39.88 v122.68,39.88
A14
  Top 0.406: IC6.39 122.94,42.23 122.94,47.24 124.46,47.24 124.46,47.26 RTL1.10
A15  (via drill 0.7)
  Top 0.406: 118.33,41.43 IC6.38 | v117.35,43.69 117.35,42.42 118.33,41.43 | 118.36,41.4 118.33,41.43 | RTL1.9 121.92,47.91 v121.92,47.24
  Bottom 0.406: v117.35,43.69 117.35,44.7 119.89,47.24 v121.92,47.24
A16  (via drill 0.7)
  Top 0.406: RTL1.8 127.46,48.56 v127.76,48.26 | IC6.37 117.61,40.63 v117.35,40.89
  Bottom 0.406: v117.35,40.89 116.33,41.91 116.33,44.7 119.63,48.01 121.16,48.01 121.41,48.26 v127.76,48.26
A17  (via drill 0.7)
  Top 0.406: RTL1.7 121.92,49.21 v121.67,49.28 | IC6.36 116.88,39.83 v115.57,41.15
  Bottom 0.406: v115.57,41.15 115.57,44.96 119.38,48.77 120.9,48.77 121.41,49.28 v121.67,49.28
A18  (via drill 0.7)
  Top 0.406: RTL1.5 126.75,50.51 v127.76,51.31 | IC6.35 116.08,39.03 v116.08,39.12
  Bottom 0.406: v116.08,39.12 114.55,40.64 114.55,44.96 119.13,49.53 120.4,49.53 121.16,50.29 126.75,50.29 v127.76,51.31
A19  (via drill 0.7)
  Top 0.406: IC6.32 118.27,34.39 122.17,30.48 v122.17,30.23 | R31.2 123.7,23.11 v122.17,23.11
  Bottom 0.406: v122.17,23.11 v122.17,30.23
A20  (via drill 0.7)
  Top 0.406: IC6.31 117.47,34.17 120.65,30.99 v120.65,30.23 | R29.2 126.24,21.59 122.17,21.59 v120.65,23.11
  Bottom 0.406: v120.65,23.11 v120.65,30.23
A21  (via drill 0.7)
  Top 0.406: IC6.9 108.46,43.03 110.74,40.75 v110.74,37.34 | RTL1.4 122.83,51.16 v122.68,51.31
  Bottom 0.406: v122.68,51.31 122.68,51.05 120.9,51.05 120.14,50.29 116.59,50.29 115.06,48.51 114.05,48.51 113.54,48.01 112.52,48.01 112.01,47.5 112.01,46.48 111.51,45.97 111.51,38.1 v110.74,37.34
CAN_INT  (via drill 0.7)
  Top 0.406: v17.53,42.42 IC4.12 | 25.15,44.2 v25.15,44.09 25.15,43.83 IC2.8
  Bottom 0.406: v17.53,42.42 23.11,42.42 v25.15,44.09
CAN_INT1  (via drill 0.7)
  Top 0.406: v98.3,42.42 IC7.12 | 105.92,44.2 v105.92,44.09 105.92,43.83 IC6.8
  Bottom 0.406: v98.3,42.42 103.89,42.42 v105.92,44.09
CS
  Top 0.406: IC4.16 21.34,47.5 22.35,46.48 22.35,42.23 IC2.10
CS1
  Top 0.406: IC7.16 102.11,47.5 103.12,46.48 103.12,42.23 IC6.10
D0  (via drill 0.7)
  Top 0.406: IC2.51 35.9,51.31 35.81,51.31 35.81,52.07 37.59,53.85 38.35,53.85 v38.86,54.36 | RTL.36 49.91,34.54 v49.02,34.54
  Bottom 0.406: v38.86,54.36 39.12,54.61 55.63,54.61 55.63,49.53 53.85,49.53 53.85,34.54 v49.02,34.54
D1  (via drill 0.7)
  Top 0.406: IC2.50 36.7,51.94 37.34,52.58 v38.1,52.58 | RTL.37 50.56,35.56 v50.04,35.56
  Bottom 0.406: v38.1,52.58 38.61,52.58 39.88,53.85 49.02,53.85 51.56,51.56 51.56,48.51 53.09,48.51 53.09,35.56 v50.04,35.56
D2  (via drill 0.7)
  Top 0.406: IC2.49 38.53,51.23 v38.61,51.31 | RTL.38 51.21,36.83 50.04,36.83 v49.78,37.08
  Bottom 0.406: v38.61,51.31 38.61,51.56 40.13,53.09 48.51,53.09 50.8,50.8 50.8,47.75 52.32,47.75 52.32,36.83 50.04,36.83 v49.78,37.08
D3  (via drill 0.7)
  Top 0.406: IC2.48 39.3,49.46 40.64,50.8 v40.64,52.07 | RTL.39 51.86,37.85 v51.05,37.85
  Bottom 0.406: v40.64,52.07 40.89,52.32 48.01,52.32 50.04,50.29 50.04,46.99 51.56,46.99 51.56,38.35 v51.05,37.85
D4  (via drill 0.7)
  Top 0.406: IC2.47 35.95,48.63 v35.56,48.26 | RTL.40 52.51,30.41 v51.82,29.72
  Bottom 0.406: v35.56,48.26 35.56,47.75 33.02,45.21 33.02,39.62 34.54,38.1 37.85,38.1 43.43,32.51 51.82,32.51 v51.82,29.72
D5  (via drill 0.7)
  Top 0.406: v50.55,28.7 52.32,28.7 53.16,29.54 RTL.41 | IC2.46 37.93,47.83 37.34,47.24 34.04,47.24 v33.78,47.5
  Bottom 0.406: v33.78,47.5 33.78,46.99 32.26,45.47 32.26,39.37 34.29,37.34 37.59,37.34 43.43,31.5 50.55,31.5 v50.55,28.7
D6  (via drill 0.7)
  Top 0.406: v51.56,27.69 52.32,27.69 53.81,29.17 RTL.42 | IC2.45 38.14,47.03 37.59,46.48 32.77,46.48 v32.26,46.99
  Bottom 0.406: v51.56,27.69 49.53,27.69 49.53,30.48 43.43,30.48 37.34,36.58 34.04,36.58 31.5,39.12 31.5,45.72 32.26,46.48 v32.26,46.99
D7  (via drill 0.7)
  Top 0.406: IC2.44 40.39,46.23 v40.89,45.72 | RTL.43 54.46,33.68 53.59,34.54 53.59,43.94 v49.28,43.94
  Bottom 0.406: v40.89,45.72 41.4,45.21 46.99,45.21 46.99,43.94 v49.28,43.94
D8  (via drill 0.7)
  Top 0.406: IC6.51 116.67,51.31 116.59,51.31 116.59,52.07 118.36,53.85 119.13,53.85 v119.63,54.36 | RTL1.36 130.68,34.54 v129.79,34.54
  Bottom 0.406: v119.63,54.36 119.89,54.61 136.4,54.61 136.4,49.53 134.62,49.53 134.62,34.54 v129.79,34.54
D9  (via drill 0.7)
  Top 0.406: IC6.50 117.47,51.94 118.11,52.58 v118.87,52.58 | RTL1.37 131.33,35.56 v130.81,35.56
  Bottom 0.406: v118.87,52.58 119.38,52.58 120.65,53.85 129.79,53.85 132.33,51.56 132.33,48.51 133.86,48.51 133.86,35.56 v130.81,35.56
D10  (via drill 0.7)
  Top 0.406: IC6.49 119.31,51.23 v119.38,51.31 | RTL1.38 131.98,36.83 130.81,36.83 v130.56,37.08
  Bottom 0.406: v119.38,51.31 119.38,51.56 120.9,53.09 129.29,53.09 131.57,50.8 131.57,47.75 133.1,47.75 133.1,36.83 130.81,36.83 v130.56,37.08
D11  (via drill 0.7)
  Top 0.406: IC6.48 120.07,49.46 121.41,50.8 v121.41,52.07 | RTL1.39 132.63,37.85 v131.83,37.85
  Bottom 0.406: v121.41,52.07 121.67,52.32 128.78,52.32 130.81,50.29 130.81,46.99 132.33,46.99 132.33,38.35 v131.83,37.85
D12  (via drill 0.7)
  Top 0.406: IC6.47 116.72,48.63 v116.33,48.26 | RTL1.40 133.28,30.41 v132.59,29.72
  Bottom 0.406: v116.33,48.26 116.33,47.75 113.79,45.21 113.79,39.62 115.32,38.1 118.62,38.1 124.21,32.51 132.59,32.51 v132.59,29.72
D13  (via drill 0.7)
  Top 0.406: v131.32,28.7 133.1,28.7 133.93,29.54 RTL1.41 | IC6.46 118.7,47.83 118.11,47.24 114.81,47.24 v114.55,47.5
  Bottom 0.406: v114.55,47.5 114.55,46.99 113.03,45.47 113.03,39.37 115.06,37.34 118.36,37.34 124.21,31.5 131.32,31.5 v131.32,28.7
D14  (via drill 0.7)
  Top 0.406: v132.33,27.69 133.1,27.69 134.58,29.17 RTL1.42 | IC6.45 118.92,47.03 118.36,46.48 113.54,46.48 v113.03,46.99
  Bottom 0.406: v132.33,27.69 130.3,27.69 130.3,30.48 124.21,30.48 118.11,36.58 114.81,36.58 112.27,39.12 112.27,45.72 113.03,46.48 v113.03,46.99
D15  (via drill 0.7)
  Top 0.406: IC6.44 121.16,46.23 v121.67,45.72 | RTL1.43 135.23,33.68 134.37,34.54 134.37,43.94 v130.05,43.94
  Bottom 0.406: v121.67,45.72 122.17,45.21 127.76,45.21 127.76,43.94 v130.05,43.94
GND1  (via drill 0.7)  (1 unrouted)
  Top 0.254: 131.32,55.63 130.81,55.63 RTL1.95 | RTL1.90 133.86,55.63 133.35,55.63 RTL1.91 133.35,56.64 133.35,57.91 | 133.28,54.61 132.59,54.61 RTL1.92 132.59,55.63 132.08,55.63 RTL1.93 131.83,55.63 131.32,55.63 | 131.32,55.63 RTL1.94 | RTL1.28 124.71,35.56 124.71,36.07 RTL1.27 124.71,36.32 | 124.71,37.59 RTL1.25 | 124.71,36.83 RTL1.26 | 135.89,55.63 135.38,55.63 RTL1.88 | 135.89,55.63 136.4,55.63 RTL1.86 136.65,56.64 136.65,57.91 | 135.89,55.63 RTL1.87 | 142.49,35.56 142.49,35.05 RTL1.52 | 124.71,39.37 RTL1.22 124.71,39.62 | IC6.59 110.24,51.31 109.73,51.31 IC6.60 109.22,51.31 108.71,51.31 IC6.61 | 130.81,57.91 130.56,57.91 | RTL1.56 141.48,37.59 140.97,37.08 v140.72,36.58 141.22,36.32 141.48,36.32 RTL1.54 142.49,36.07 142.49,35.56 | RTL1.18 124.71,41.91 124.71,41.4 RTL1.19 | 124.71,40.13 RTL1.21 | 142.49,35.56 RTL1.53 | 124.71,38.1 RTL1.24 | 124.71,38.86 RTL1.23 | ISP1.4 120.14,10.67 | 50.55,55.63 50.04,55.63 RTL.95 | RTL.90 53.09,55.63 52.58,55.63 RTL.91 52.58,56.64 52.58,57.91 | 52.51,54.61 51.82,54.61 RTL.92 51.82,55.63 51.31,55.63 RTL.93 51.05,55.63 50.55,55.63 | 50.55,55.63 RTL.94 | RTL.28 43.94,35.56 43.94,36.07 RTL.27 43.94,36.32 | 43.94,37.59 RTL.25 | 43.94,36.83 RTL.26 | 55.12,55.63 54.61,55.63 RTL.88 | 55.12,55.63 55.63,55.63 RTL.86 55.88,56.64 55.88,57.91 | 55.12,55.63 RTL.87 | 61.72,35.56 61.72,35.05 RTL.52 | 43.94,39.37 RTL.22 43.94,39.62 | IC2.59 29.46,51.31 28.96,51.31 IC2.60 28.45,51.31 27.94,51.31 IC2.61 | 50.04,57.91 49.78,57.91 | RTL.56 60.71,37.59 60.2,37.08 v59.94,36.58 60.45,36.32 60.71,36.32 RTL.54 61.72,36.07 61.72,35.56 | RTL.18 43.94,41.91 43.94,41.4 RTL.19 | 43.94,40.13 RTL.21
  Top 0.254: 61.72,35.56 RTL.53 | 43.94,38.1 RTL.24 | 43.94,38.86 RTL.23 | ISP.4 39.37,10.67
  Top 0.406: C69.2 99.57,64.26 98.95,63.65 IC13.21 93.58,63.65 92.71,64.52 v90.42,64.52 88.67,64.52 IC13.3 88.46,64.45 88.39,64.52 87.88,64.52 87.63,64.26 87.63,62.99 87.78,62.85 IC13.5 | IC14.11 105.54,65.66 108.08,68.2 IC14.8 111.76,68.2 | C71.2 112.86,67.91 112.78,67.82 112.39,68.2 111.76,68.2 | C66.2 117.6,60.96 117.98,60.58 | 120.14,60.45 120.27,60.58 IC12.15 | IC6.53 115.07,53.33 114.55,53.85 114.55,54.1 114.3,54.36 C19.1 | C21.1 110.07,54.27 110.27,54.07 IC6.59 | RTL1.91 133.28,54.61 133.28,53.02 v133.1,52.83 | C69.2 99.57,64.01 | COM1.6 111.76,75.44 111.76,68.2 | C69.2 99.73,64.1 100.58,63.25 100.58,61.72 101.51,60.79 C74.2 101.77,60.79 101.98,60.58 IC14.15 104.27,60.58 104.39,60.45 105.66,60.45 105.92,60.2 105.92,58.93 105.32,58.08 C70.2 105.16,56.9 | v127.76,46.74 arc-90 127.64,46.61 RTL1.11 124.64,46.05 124.71,45.97 124.7,45.96 RTL1.12 | v127.51,40.64 127.39,40.76 | v136.14,34.54 135.88,34.54 RTL1.44 135.88,31.74 135.89,31.75 135.89,29.46 132.84,26.42 132.84,23.03 | RTL1.55 140.72,36.86 v140.72,36.58 | RTL1.64 139.7,42.71 v139.7,43.69 | 124.64,45.54 124.71,45.47 124.64,45.39 RTL1.13 124.64,44.78 124.71,44.7 124.67,44.66 RTL1.14 | 144.27,18.29 144.27,20.83 C56.2 144.18,19.05 v142.24,19.05 | 144.27,18.29 C55.1 | 144.27,18.29 144.27,15.75 | C57.2 144.27,13.21 144.27,15.75 | 144.27,15.75 C54.1 | 132.84,23.03 R32.1 | 132.84,23.03 134.45,23.03 v135.38,22.1 | 119.63,10.92 119.89,10.67 120.14,10.67 122.43,10.67 122.43,20.83 131.32,20.83 131.32,22.86 | RTL1.83 138.48,57.91 v138.43,57.91 | 110.24,55.63 110.24,54.36 110.24,56.13 | IC6.61 108.71,51.23 108.71,50.04 107.07,50.04 IC6.63
  Top 0.406: 110.24,35.63 IC6.22 110.27,33.81 108.71,32.26 107.19,32.26 106.43,31.5 v106.43,30.48 | IC7.9 88.9,39.88 v88.9,38.61 | C20.1 106.43,26.42 v106.68,26.67 | IC10.8 110.49,14.22 110.49,1.52 | C37.2 18.8,64.26 18.18,63.65 IC8.21 12.81,63.65 11.94,64.52 v9.65,64.52 7.9,64.52 IC8.3 7.69,64.45 7.62,64.52 7.11,64.52 6.86,64.26 6.86,62.99 7,62.85 IC8.5 | IC9.11 24.77,65.66 27.3,68.2 IC9.8 30.99,68.2 | C39.2 32.09,67.91 32,67.82 31.62,68.2 30.99,68.2 | C34.2 36.83,60.96 37.21,60.58 | 39.37,60.45 39.5,60.58 IC1.15 | IC2.53 34.3,53.33 33.78,53.85 33.78,54.1 33.53,54.36 C5.1 | C7.1 29.3,54.27 29.5,54.07 IC2.59 | RTL.91 52.51,54.61 52.51,53.02 v52.32,52.83 | C37.2 18.8,64.01 | COM.6 30.99,75.44 30.99,68.2 | C37.2 18.96,64.1 19.81,63.25 19.81,61.72 20.74,60.79 C42.2 20.99,60.79 21.21,60.58 IC9.15 23.5,60.58 23.62,60.45 24.89,60.45 25.15,60.2 25.15,58.93 24.55,58.08 C38.2 24.38,56.9 | v46.99,46.74 arc-90 46.87,46.61 RTL.11 43.87,46.05 43.94,45.97 43.93,45.96 RTL.12 | v46.74,40.64 46.61,40.76 | v55.37,34.54 55.11,34.54 RTL.44 55.11,31.74 55.12,31.75 55.12,29.46 52.07,26.42 52.07,23.03 | RTL.55 59.94,36.86 v59.94,36.58 | RTL.64 58.93,42.71 v58.93,43.69 | 43.87,45.54 43.94,45.47 43.87,45.39 RTL.13 43.87,44.78 43.94,44.7 43.9,44.66 RTL.14 | 63.5,18.29 63.5,20.83 C4.2 63.41,19.05 v61.47,19.05 | 63.5,18.29 C3.1 | 63.5,18.29 63.5,15.75 | C14.2 63.5,13.21 63.5,15.75 | 63.5,15.75 C2.1 | 52.07,23.03 R13.1 | 52.07,23.03 53.68,23.03 v54.61,22.1 | 38.86,10.92 39.12,10.67 39.37,10.67 41.66,10.67 41.66,20.83 50.55,20.83 50.55,22.86 | RTL.83 57.71,57.91 v57.66,57.91 | 29.46,55.63 29.46,54.36 29.46,56.13
  Top 0.406: IC2.61 27.94,51.23 27.94,50.04 26.3,50.04 IC2.63 | 29.46,35.63 IC2.22 29.5,33.81 27.94,32.26 26.42,32.26 25.65,31.5 v25.65,30.48 | IC4.9 8.13,39.88 v8.13,38.61 | C6.1 25.65,26.42 v25.91,26.67 | IC5.8 29.72,14.22 29.72,1.52
  Top 0.813: 117.98,60.58 IC12.15 | C62.2 122.59,59.78 121.92,60.45 120.14,60.45 | 129.71,68.07 C63.2 | 129.71,68.07 133.35,68.07 C43.- 140.21,61.21 | 140.21,61.21 C44.- | 127.39,40.76 124.71,40.76 | 124.71,40.76 RTL1.20 | RTL1.12 124.64,45.54 | 84.07,1.5 101.6,1.52 | 101.6,1.52 101.68,1.52 CAN5.1 95.5,15.75 JTAG1.2 | H5.B3,0 155.19,1.52 140.72,1.52 | 101.6,1.52 110.49,1.52 119.63,1.52 | 119.63,1.52 123.95,1.52 | 123.95,1.52 140.72,1.52 | ETH1.G1 123.95,6.1 123.95,1.52 | 140.72,1.52 ETH1.G2 | 128.27,74.17 COM1.G2 129.54,74.17 | 129.71,68.07 129.71,74.17 129.54,74.17 | 133.77,77.47 133.77,74.17 129.54,74.17 | 133.77,77.47 R25.1 | X1.2 141.25,77.47 133.77,77.47 | ISP1.4 ISP1.6 ISP1.8 | ISP1.8 ISP1.10 | 119.63,1.52 ISP1.8 | v140.72,36.58 139.45,36.58 139.45,39.88 137.41,41.91 137.41,43.69 137.67,43.69 | v139.7,43.69 137.67,43.69 | 140.21,61.21 138.43,59.44 v138.43,57.91 136.65,57.91 133.35,57.91 130.81,57.91 | v131.32,45.47 135.64,45.47 135.64,43.69 137.67,43.69 | 130.56,57.91 125.48,57.91 125.48,55.88 122.43,55.88 122.43,56.9 | 114.3,56.13 114.3,54.36 | 114.3,56.13 116.08,56.13 116.08,60.71 117.6,60.71 C66.2 | 110.24,54.36 C21.1 | 110.24,55.63 105.16,55.63 105.16,56.9 | 110.24,56.13 114.3,56.13 | 124.71,36.32 124.71,36.83 124.71,37.59 124.71,38.1 124.71,38.86 124.71,39.37 | 124.71,40.76 124.71,40.13 124.71,39.62 | 124.71,40.76 124.71,41.4 | 37.21,60.58 IC1.15 | C30.2 41.82,59.78 41.15,60.45 39.37,60.45 | 48.93,68.07 C31.2 | 48.93,68.07 52.58,68.07 C10.- 59.44,61.21 | 59.44,61.21 C11.- | 46.61,40.76 43.94,40.76 | 43.94,40.76 RTL.20 | RTL.12 43.87,45.54 | 3.3,1.5 20.83,1.52 | 20.83,1.52 20.91,1.52 CAN.1 14.73,15.75 JTAG.2 | H1.B3,0 74.42,1.52 59.94,1.52
  Top 0.813: 20.83,1.52 29.72,1.52 38.86,1.52 | 38.86,1.52 43.18,1.52 | 43.18,1.52 59.94,1.52 | ETH.G1 43.18,6.1 43.18,1.52 | 59.94,1.52 ETH.G2 | 47.5,74.17 COM.G2 48.77,74.17 | 48.93,68.07 48.93,74.17 48.77,74.17 | 53,77.47 53,74.17 48.77,74.17 | 53,77.47 R7.1 | X2.2 60.48,77.47 53,77.47 | ISP.4 ISP.6 ISP.8 | ISP.8 ISP.10 | 38.86,1.52 ISP.8 | v59.94,36.58 58.67,36.58 58.67,39.88 56.64,41.91 56.64,43.69 56.9,43.69 | v58.93,43.69 56.9,43.69 | 59.44,61.21 57.66,59.44 v57.66,57.91 55.88,57.91 52.58,57.91 50.04,57.91 | v50.55,45.47 54.86,45.47 54.86,43.69 56.9,43.69 | 49.78,57.91 44.7,57.91 44.7,55.88 41.66,55.88 41.66,56.9 | 33.53,56.13 33.53,54.36 | 33.53,56.13 35.31,56.13 35.31,60.71 36.83,60.71 C34.2 | 29.46,54.36 C7.1 | 29.46,55.63 24.38,55.63 24.38,56.9 | 29.46,56.13 33.53,56.13 | 43.94,36.32 43.94,36.83 43.94,37.59 43.94,38.1 43.94,38.86 43.94,39.37 | 43.94,40.76 43.94,40.13 43.94,39.62 | 43.94,40.76 43.94,41.4
  Bottom 0.406: 112.52,27.69 C22.1 | 112.52,27.69 C23.1 | C51.1 141.15,22.43 140.97,22.61 140.77,22.4 140.46,22.4 | 140.46,22.4 C52.1 | C58.2 133.1,51.05 v133.1,52.83 | 111.76,75.44 113.03,76.71 115.06,76.71 115.82,75.95 | 115.82,75.95 COM1.3 | COM1.9 118.67,76.71 116.59,76.71 115.82,75.95 | C50.2 129.39,46.74 129.29,46.74 | 127.67,40.81 v127.51,40.64 | v140.72,36.58 140.72,36.74 C60.2 138.99,33.53 136.14,33.53 v136.14,34.54 C59.1 | v139.7,43.69 139.7,43.85 | 111.76,75.44 COM1.6 | 111.76,84.58 111.76,75.44 | 83.31,40.89 C48.2 83.31,41.15 | 83.31,41.15 C47.2 | 88.9,67.06 82.3,67.06 82.3,60.71 83.31,60.71 | 88.9,64.52 v90.42,64.52 | 129.39,40.89 C49.1 | v135.38,22.1 136.4,21.08 140.46,21.08 | 140.46,21.08 140.46,22.4 | v142.24,19.05 140.46,20.83 140.46,21.08 | JTAG1.10 92.2,33.53 92.2,23.37 JTAG1.2 | 109.47,26.67 v106.68,26.67 | 112.52,26.67 109.47,26.67 | 112.52,26.67 112.52,27.69 | v106.43,30.48 106.43,29.72 109.47,26.67 | IC10.8 113.03,16.76 115.57,16.76 115.57,26.67 112.52,26.67 | H8.B3,0 152.65,84.33 143.79,84.33 X1.2 | 83.31,60.71 C68.2 | 83.31,60.71 C67.1 | 83.31,41.15 82.3,40.13 82.3,35.56 82.55,35.31 83.06,35.31 | 31.75,27.69 C8.1 | 31.75,27.69 C9.1 | C17.1 60.38,22.43 60.2,22.61 59.99,22.4 59.69,22.4 | 59.69,22.4 C18.1 | C24.2 52.32,51.05 v52.32,52.83 | 30.99,75.44 32.26,76.71 34.29,76.71 35.05,75.95 | 35.05,75.95 COM.3 | COM.9 37.9,76.71 35.81,76.71 35.05,75.95 | C16.2 48.62,46.74 48.51,46.74 | 46.9,40.81 v46.74,40.64 | v59.94,36.58 59.94,36.74 C26.2 58.22,33.53 55.37,33.53 v55.37,34.54 C25.1 | v58.93,43.69 58.93,43.85 | 30.99,75.44 COM.6 | 30.99,84.58 30.99,75.44 | 2.54,40.89 C29.2 2.54,41.15 | 2.54,41.15 C28.2 | 8.13,67.06 1.52,67.06 1.52,60.71 2.54,60.71
  Bottom 0.406: 8.13,64.52 v9.65,64.52 | 48.62,40.89 C15.1 | v54.61,22.1 55.63,21.08 59.69,21.08 | 59.69,21.08 59.69,22.4 | v61.47,19.05 59.69,20.83 59.69,21.08 | JTAG.10 11.43,33.53 11.43,23.37 JTAG.2 | 28.7,26.67 v25.91,26.67 | 31.75,26.67 28.7,26.67 | 31.75,26.67 31.75,27.69 | v25.65,30.48 25.65,29.72 28.7,26.67 | IC5.8 32.26,16.76 34.8,16.76 34.8,26.67 31.75,26.67 | H4.B3,0 71.88,84.33 63.02,84.33 X2.2 | 2.54,60.71 C36.2 | 2.54,60.71 C35.1 | 2.54,41.15 1.52,40.13 1.52,35.56 1.78,35.31 2.29,35.31
  Bottom 0.813: v127.76,46.74 129.29,46.74 129.29,45.47 v131.32,45.47 131.32,40.89 129.39,40.89 | C49.1 127.67,40.81 | 139.7,43.85 C61.1 | IC11.GND 147.57,51.31 C46.2 C45.2 147.57,50.04 146.05,50.04 146.05,43.69 145.8,43.69 | 103.3,84.58 92.71,84.58 ISP_1.10 | 103.3,84.58 COM1.G1 | COM1.G2 128.27,74.17 128.27,84.58 111.76,84.58 103.3,84.58 | 88.9,81.79 H6.B3,0 | 88.9,81.79 88.9,67.06 88.9,64.52 v88.9,38.61 88.9,35.31 83.06,35.31 83.06,5.33 | ISP_1.10 88.9,83.06 88.9,81.79 | ISP_1.10 ISP_1.8 ISP_1.6 ISP_1.4 | ETH1.G1 123.95,6.1 | 145.8,43.69 v139.7,43.69 | 145.8,43.69 155.7,43.69 155.7,32.51 153.16,32.51 153.16,4.57 155.19,4.57 H5.B3,0 | v138.43,57.91 143,57.91 146.05,54.86 146.05,50.29 | JTAG1.2 95.5,20.07 106.43,20.07 108.2,21.84 IC10.2 | v46.99,46.74 48.51,46.74 48.51,45.47 v50.55,45.47 50.55,40.89 48.62,40.89 | C15.1 46.9,40.81 | 58.93,43.85 C27.1 | IC3.GND 66.8,51.31 C13.2 C12.2 66.8,50.04 65.28,50.04 65.28,43.69 65.02,43.69 | 22.53,84.58 11.94,84.58 ISP_48.10 | 22.53,84.58 COM.G1 | COM.G2 47.5,74.17 47.5,84.58 30.99,84.58 22.53,84.58 | 8.13,81.79 H2.B3,0 | 8.13,81.79 8.13,67.06 8.13,64.52 v8.13,38.61 8.13,35.31 2.29,35.31 2.29,5.33 | ISP_48.10 8.13,83.06 8.13,81.79 | ISP_48.10 ISP_48.8 ISP_48.6 ISP_48.4 | ETH.G1 43.18,6.1 | 65.02,43.69 v58.93,43.69 | 65.02,43.69 74.93,43.69 74.93,32.51 72.39,32.51 72.39,4.57 74.42,4.57 H1.B3,0 | v57.66,57.91 62.23,57.91 65.28,54.86 65.28,50.29 | JTAG.2 14.73,20.07 25.65,20.07 27.43,21.84 IC5.2
  other vias: 122.68,62.23 119.13,57.66 93.98,71.37 90.17,52.83 145.03,44.7 138.43,49.02 130.3,38.86 122.68,71.37 125.73,19.3 119.13,27.69 114.55,33.53 82.8,55.12 82.55,65.79 82.55,46.23 82.8,35.56 135.64,25.15 145.03,25.4 145.03,29.21 142.49,66.04 108.71,17.53 137.92,40.39 94.74,47.5 97.54,46.23 41.91,62.23 38.35,57.66 13.21,71.37 9.4,52.83 64.26,44.7 57.66,49.02 49.53,38.86 41.91,71.37 44.96,19.3 38.35,27.69 33.78,33.53 2.03,55.12 1.78,65.79 1.78,46.23 2.03,35.56 54.86,25.15 64.26,25.4 64.26,29.21 61.72,66.04 27.94,17.53 57.15,40.39 13.97,47.5 16.76,46.23
  pour Top (isolate 0.254): 0,86.36 78.74,86.36 78.74,0 0,0
  pour Bottom (isolate 0.254): 0,86.36 78.74,86.36 78.74,0 0,0
  pour Bottom (isolate 0.254): 81.28,86.36 160.02,86.36 160.02,0 81.28,0
  pour Top (isolate 0.254): 81.28,86.36 160.02,86.36 160.02,0 81.28,0
MISO  (via drill 0.7)
  Top 0.406: IC4.15 21.08,46.23 21.59,45.72 v21.59,39.88 21.59,39.83 IC2.13 | v31.24,17.78 R6.2
  Bottom 0.406: v31.24,17.78 31.24,24.13 30.73,24.64 19.05,24.64 18.54,25.15 18.54,26.92 21.59,29.97 21.59,33.27 16.76,38.1 16.76,39.88 v21.59,39.88
MISO1  (via drill 0.7)
  Top 0.406: IC7.15 101.85,46.23 102.36,45.72 v102.36,39.88 102.36,39.83 IC6.13 | v112.01,17.78 R24.2
  Bottom 0.406: v112.01,17.78 112.01,24.13 111.51,24.64 99.82,24.64 99.31,25.15 99.31,26.92 102.36,29.97 102.36,33.27 97.54,38.1 97.54,39.88 v102.36,39.88
MISO_1
  Top 0.406: R38.2 96.01,56.13 95.76,56.13 IC13.16
MISO_48
  Top 0.406: R14.2 15.24,56.13 14.99,56.13 IC8.16
MOSI  (via drill 0.7)
  Top 0.406: IC4.14 v17.53,44.96 16.51,44.96 13.72,42.16 v12.19,42.16 | IC2.12 25.65,40.64 v26.67,41.4 | R5.2 33.78,20.32 33.78,19.05 v29.21,19.05
  Bottom 0.406: v26.67,41.4 26.92,41.66 26.92,44.96 25.91,45.97 23.37,45.97 22.35,44.96 v17.53,44.96 | v29.21,19.05 14.48,19.05 10.67,23.11 10.67,34.54 12.45,34.54 13.72,35.81 12.19,37.34 v12.19,42.16
MOSI1  (via drill 0.7)
  Top 0.406: IC7.14 v98.3,44.96 97.28,44.96 94.49,42.16 v92.96,42.16 | IC6.12 106.43,40.64 v107.44,41.4 | R23.2 114.55,20.32 114.55,19.05 v109.98,19.05
  Bottom 0.406: v107.44,41.4 107.7,41.66 107.7,44.96 106.68,45.97 104.14,45.97 103.12,44.96 v98.3,44.96 | v109.98,19.05 95.25,19.05 91.44,23.11 91.44,34.54 93.22,34.54 94.49,35.81 92.96,37.34 v92.96,42.16
MOSI_1
  Top 0.406: IC13.15 94.96,57.66 93.73,57.66 R37.2
MOSI_48
  Top 0.406: IC8.15 14.19,57.66 12.95,57.66 R9.2
N$1
  Top 0.305: RTL.58 63.04,38.81 63.5,38.35 63.5,33.27 64.26,32.51 74.42,32.51 75.69,31.24 U$2.6
  Bottom 0.406: R1.2 73.66,20.23 73.66,29.72 U$2.6 75.95,29.72
N$2  (via drill 0.7)
  Top 0.406: v12.95,46.23 12.95,50.04 IC4.1
  Bottom 0.406: v12.95,46.23 12.95,43.69 13.21,43.43 13.21,37.85 14.22,36.83 14.73,36.83 16,35.56 16,33.02 15.24,32.26 12.7,32.26 12.7,24.64 15.24,24.64 16,23.88 16,22.1 20.07,22.1 21.84,23.88 28.19,23.88 IC5.1
N$3
  Top 0.305: RTL.59 63.15,39.46 64.01,38.61 64.01,33.53 64.52,33.02 76.2,33.02 77.47,31.75 77.47,25.65 76.45,24.64 U$2.4
  Bottom 0.406: R1.1 U$2.4
N$4  (via drill 0.7)
  Top 0.406: U$2.3 77.47,15.24 77.47,11.18 76.2,9.91 67.82,9.91 67.31,9.4 64.26,9.4 63.41,10.25 C1.1 60.71,10.67 60.71,13.72 v53.34,13.72 | RTL.46 56.41,29.72 v57.66,29.72
  Bottom 0.406: v57.66,29.72 55.12,29.72 52.07,26.67 52.07,19.05 53.34,17.78 v53.34,13.72
N$5
  Top 0.406: C7.2 27.6,54.27 27.1,53.77 IC2.62
N$6
  Top 0.406: Q1.1 34.29,30.23 31.1,33.42 IC2.24
  Bottom 0.406: Q1.1 34.29,30.23 34.38,30.14 C9.2
N$7
  Top 0.406: Q1.2 29.46,30.23 30.3,31.06 IC2.23
  Bottom 0.406: Q1.2 29.34,30.1 29.46,29.97 29.38,29.88 C8.2
N$8
  Top 0.813: D2.C 55.63,71.37 C10.+
  Bottom 0.813: C12.1 66.89,48.43 67.06,48.26 67.56,48.77 IC3.IN 77.22,48.77 77.22,56.39 67.82,56.39 C10.+
N$9
  Top 0.406: IC1.7 45.87,67.06 47.24,67.06 47.24,69.09 44.45,69.09 44.2,69.34 44.2,72.14 38.61,77.72 31.5,77.72 29.46,75.69 29.46,73.15 29.72,72.9 COM.1
N$10
  Top 0.813: X2.1 65.51,81.31 D2.A
N$11  (via drill 0.7)
  Top 0.406: C1.2 v66.55,10.67 74.42,10.67 U$2.1 | RTL.45 55.76,28.7 v56.39,28.7
  Bottom 0.406: v56.39,28.7 55.12,28.7 52.83,26.42 52.83,22.1 54.61,20.32 54.61,19.05 56.13,17.53 56.13,14.48 60.71,14.48 60.71,10.67 v66.55,10.67
N$12
  Top 0.406: C3.2 71.63,18.29 72.9,19.56 72.9,25.65 74.17,26.92 75.44,26.92 U$2.5
N$13
  Top 0.406: C2.2 74.42,15.75 U$2.2
N$14
  Top 0.406: U$2.11 68.07,14.22 67.06,13.21 C14.1
N$15
  Top 0.406: C4.1 68.58,20.83 70.1,22.35 70.1,26.16 69.09,27.18 U$2.8
N$16
  Bottom 0.813: F1.1 16.08,10.85 20.32,6.6 31.5,6.6 31.5,9.57 | 31.5,9.57 31.5,9.65 | 31.5,9.57 CAN.4
N$17  (via drill 0.7)
  Top 0.406: v16.26,52.32 15.24,53.34 R14.1
  Bottom 0.406: v16.26,52.32 16.76,52.83 16.76,79.25 13.21,79.25 13.21,81.79 ISP_48.9
N$18
  Top 0.406: U$2.12 61.47,11.94 61.47,14.99 46.99,14.99 46.99,17.02 ETH.1-1
N$19  (via drill 0.7)
  Top 0.406: v61.47,17.02 61.47,15.75 48.51,15.75 48.51,19.56 ETH.1-2
  Bottom 0.406: v61.47,17.02 U$2.10
N$20
  Top 0.406: U$2.9 65.53,22.1 62.74,22.1 58.93,18.29 50.8,18.29 49.53,17.02 ETH.1-3
N$21  (via drill 0.7)
  Top 0.406: v13.97,44.2 11.94,44.2 11.94,48.77 IC4.2 | v19.3,23.37 20.57,22.1 IC5.4
  Bottom 0.406: v13.97,44.2 13.97,38.1 14.48,37.59 15.24,37.59 18.8,34.04 18.8,33.02 18.03,32.26 16.76,32.26 16,31.5 16,25.15 16.51,24.64 18.03,24.64 v19.3,23.37
N$22
  Top 0.406: R6.1 38.86,17.78 38.86,16 34.54,16 34.54,3.05 ISP.9
N$23
  Top 0.406: R20.1 20.99,16.26 23.11,16.26 IC5.6 22.86,12.45 22.86,7.87 24.13,6.6 26.16,6.6 27.91,8.35 CAN.3
N$24
  Top 0.406: U$2.7 66.04,27.69 66.04,23.62 65.28,22.86 62.48,22.86 60.2,20.83 54.86,20.83 53.59,19.56 ETH.1-6
N$25
  Top 0.406: ISP.1 36.32,14.73 39.62,14.73 39.62,19.05 38.35,20.32 R5.1
N$26  (via drill 0.7)
  Top 0.406: v20.57,30.48 20.57,28.96 R3.1 | IC2.1 24.48,49.43 25.4,48.51 v25.4,47.24
  Bottom 0.406: v25.4,47.24 15.75,47.24 15.75,39.62 16,39.37 16,37.85 20.57,33.27 v20.57,30.48
N$27
  Top 0.406: IC4.11 14.48,41.15 9.91,36.58 9.91,9.91 8.13,8.13 8.13,4.57 9.4,3.3 CAN1.K
N$28
  Top 0.406: R16.1 69.09,6.86 LINK.A
N$29
  Top 0.406: ISP.7 37.59,6.86 37.59,11.94 40.64,11.94 40.64,20.32 38.35,22.61 R4.1 37.08,22.61
N$30  (via drill 0.7)
  Top 0.406: v14.73,52.32 12.95,52.32 R9.1
  Bottom 0.406: v14.73,52.32 16,53.59 16,72.9 ISP_48.1 14.22,72.9
N$31
  Top 0.406: R7.2 54.7,79.5 55.12,79.5 POWER.K
N$32  (via drill 0.7)
  Top 0.406: IC2.58 30.3,54.86 v30.73,54.86
  Bottom 0.406: v30.73,54.86 26.67,54.86 24.38,52.58 19.05,52.58 18.54,53.09 18.54,70.1 52.58,70.1 POWER.A
N$33
  Top 0.406: COM.2 32.31,76.25 32.77,76.71 34.29,76.71 35.05,75.95 35.05,74.93 36.32,73.66 36.32,72.14 34.8,70.61 34.8,63.75 35.56,62.99 39.37,62.99 39.6,63.22 | 39.6,63.22 39.62,63.25 | 39.6,63.22 IC1.13
N$34
  Top 0.406: 62.05,25.22 61.85,25.02 Q2.2 61.72,25.15 59.94,28.45 59.94,33.02 61.19,34.26 RTL.51
  Bottom 0.406: Q2.2 61.85,25.02 62.12,24.75 C17.2
N$35
  Top 0.406: Q2.1 57.15,25.15 59.01,28.53 RTL.50
  Bottom 0.406: Q2.1 57.02,25.02 56.9,24.89 57.09,24.7 C18.2
N$36  (via drill 0.61, 0.7)
  Top 0.254: R10.1 44.96,25.15
  Top 0.406: R10.1 45.47,24.64 46.74,24.64 46.74,23.11 48.01,23.11 R11.2 | v60.96,30.99 v73.66,30.99 | v45.72,33.53 42.67,30.48 v42.67,29.46 | 44.96,25.15 v44.96,27.18 | RTL.77 63.65,51.16 65.53,49.28 65.53,46.74 v67.06,45.21
  Bottom 0.406: v73.66,30.99 75.95,30.99 75.95,44.2 74.93,45.21 v67.06,45.21 | v60.96,30.99 58.93,32.77 53.09,32.77 52.32,33.53 v45.72,33.53 | v44.96,27.18 v42.67,29.46
N$37  (via drill 0.61, 0.7)
  Top 0.254: 43.43,25.15 R12.1
  Top 0.406: v43.43,26.67 43.43,25.15 | v66.8,8.38 67.56,8.38 68.33,9.14 v77.22,9.14 | RTL.79 63.87,52.46 v68.83,47.5
  Bottom 0.406: v43.43,26.67 43.43,14.73 49.02,14.73 56.13,7.62 58.93,7.62 59.69,8.38 v66.8,8.38 | v68.83,47.5 77.47,47.5 77.47,9.4 v77.22,9.14
N$38  (via drill 0.7)
  Top 0.406: 20.07,39.88 IC4.10 14.22,39.88 10.67,36.32 10.67,8.64 v13.46,8.64
  Bottom 0.406: CAN2.K 13.46,4.83 v13.46,8.64
N$39
  Top 0.406: 50.55,24.64 R13.2 50.55,25.91 48.61,27.85 RTL.34
N$40  (via drill 0.7)
  Top 0.406: v17.78,52.32 R8.1
  Bottom 0.406: v17.78,52.32 17.78,80.52 ISP_48.7
N$41
  Top 2: 20,-1 -1,-1 -1,20
N$43
  Top 2: 140,-1 161,-1 161,20
N$44
  Top 0.406: R17.1 62.74,6.86 62.74,5.33 ACT.A
N$45  (via drill 0.7)
  Top 0.406: RTL.61 59.57,40.76 v57.91,42.42
  Bottom 0.406: LINK.K 66.55,5.33 71.12,9.91 71.12,31.75 67.56,35.31 67.56,42.42 v57.91,42.42
N$46
  Top 2: 20,101 -1,101 -1,80
N$47  (via drill 0.7)
  Top 0.406: RTL.62 63.74,41.41 v63.75,41.4
  Bottom 0.406: v63.75,41.4 66.8,41.4 66.8,35.05 70.36,31.5 70.36,10.41 65.28,5.33 63.75,5.33 ACT.K
N$48